# EAGLE board CT_schematic (EAGLE 7.6.0)

Size 100 x 80 mm. Coordinates in mm from the lower left corner, seen from the top.
Outline: 0,0 100,0 100,80 0,80 0,0
Copper layers (1*16): Top 0.035mm / dielectric 1.5mm / Bottom 0.035mm
Design rules "default": minimum track width 10mil, minimum drill 24mil, track to track 8mil, track to pad 8mil, pad to pad 8mil, via to via 8mil, smd to smd 8mil, copper to edge 40mil, drill to drill 8mil, minimum pad ring 10mil, minimum via ring 8mil, stop-mask expansion 4mil, vias tented up to drill 0mil, thermal gap 10mil

## Footprints (pad centres in the part's own frame; a part is rotated, then mirrored left to right if it is on the bottom)
C0603 = smd 0.8 x 0.8: 1 -0.762,0; 2 0.762,0
C0402 = smd 0.5 x 0.5: 1 -0.508,0; 2 0.508,0
C0805 = smd 1.2 x 1.3: 1 -1.016,0; 2 1.016,0
C1210 = smd 1.2 x 2.5: 1 -1.524,0; 2 1.524,0
C1206 = smd 1.3 x 1.6: 1 -1.524,0; 2 1.524,0
EXV-9H = smd 3.505 x 1.676: 1 -2.857,0; 2 2.857,0
L0603 = smd 0.8 x 0.8: 1 -0.762,0; 2 0.762,0
R0603 = smd 0.8 x 0.8: 1 -0.762,0; 2 0.762,0
DR1040 = smd 1.6 x 3.2: 1 -4.458,0; 2 4.458,0
IND_PM3316 = smd 2.921 x 2.794: 1 -5.144,0; 2 5.144,0
PJ-037B_PACKAGE = drill 3.7 square: 1 12,0 | drill 3.2 square: 2 6,0
UFBGA176_25 = smd 0.3 x 0.3: A1 -4.55,4.55; A2 -3.9,4.55; A3 -3.25,4.55; A4 -2.6,4.55; A5 -1.95,4.55; A6 -1.3,4.55; A7 -0.65,4.55; A8 0,4.55; A9 0.65,4.55; A10 1.3,4.55; A11 1.95,4.55; A12 2.6,4.55; A13 3.25,4.55; A14 3.9,4.55; A15 4.55,4.55; B1 -4.55,3.9; B2 -3.9,3.9; B3 -3.25,3.9; B4 -2.6,3.9; B5 -1.95,3.9; B6 -1.3,3.9; B7 -0.65,3.9; B8 0,3.9; B9 0.65,3.9; B10 1.3,3.9; B11 1.95,3.9; B12 2.6,3.9; B13 3.25,3.9; B14 3.9,3.9; B15 4.55,3.9; C1 -4.55,3.25; C2 -3.9,3.25; C3 -3.25,3.25; C4 -2.6,3.25; C5 -1.95,3.25; C6 -1.3,3.25; C7 -0.65,3.25; C8 0,3.25; C9 0.65,3.25; C10 1.3,3.25; C11 1.95,3.25; C12 2.6,3.25; C13 3.25,3.25; C14 3.9,3.25; C15 4.55,3.25; D1 -4.55,2.6; D2 -3.9,2.6; D3 -3.25,2.6; D4 -2.6,2.6; D5 -1.95,2.6; D6 -1.3,2.6; D7 -0.65,2.6; D8 0,2.6; D9 0.65,2.6; D10 1.3,2.6; D11 1.95,2.6; D12 2.6,2.6; D13 3.25,2.6; D14 3.9,2.6; D15 4.55,2.6; E1 -4.55,1.95; E2 -3.9,1.95; E3 -3.25,1.95; E4 -2.6,1.95; E12 2.6,1.95; E13 3.25,1.95; E14 3.9,1.95; E15 4.55,1.95; F1 -4.55,1.3; F2 -3.9,1.3; F3 -3.25,1.3; F4 -2.6,1.3; F6 -1.3,1.3; F7 -0.65,1.3; F8 0,1.3; F9 0.65,1.3; F10 1.3,1.3; F12 2.6,1.3; F13 3.25,1.3; F14 3.9,1.3; F15 4.55,1.3; G1 -4.55,0.65; G2 -3.9,0.65; G3 -3.25,0.65; G4 -2.6,0.65; G6 -1.3,0.65; G7 -0.65,0.65; G8 0,0.65; G9 0.65,0.65; G10 1.3,0.65; G12 2.6,0.65; G13 3.25,0.65; G14 3.9,0.65; G15 4.55,0.65; H1 -4.55,0; H2 -3.9,0; H3 -3.25,0; H4 -2.6,0; H6 -1.3,0; H7 -0.65,0; H8 0,0; H9 0.65,0; H10 1.3,0; H12 2.6,0; H13 3.25,0; H14 3.9,0; H15 4.55,0; J1 -4.55,-0.65; J2 -3.9,-0.65; J3 -3.25,-0.65; J4 -2.6,-0.65; J6 -1.3,-0.65; J7 -0.65,-0.65; J8 0,-0.65; J9 0.65,-0.65; J10 1.3,-0.65; J12 2.6,-0.65; J13 3.25,-0.65; J14 3.9,-0.65; J15 4.55,-0.65; K1 -4.55,-1.3; K2 -3.9,-1.3; K3 -3.25,-1.3; K4 -2.6,-1.3; K6 -1.3,-1.3; K7 -0.65,-1.3; K8 0,-1.3; K9 0.65,-1.3; K10 1.3,-1.3; K12 2.6,-1.3; K13 3.25,-1.3; K14 3.9,-1.3; K15 4.55,-1.3; L1 -4.55,-1.95; L2 -3.9,-1.95; L3 -3.25,-1.95; L4 -2.6,-1.95; L12 2.6,-1.95; L13 3.25,-1.95; L14 3.9,-1.95; L15 4.55,-1.95; M1 -4.55,-2.6; M2 -3.9,-2.6; M3 -3.25,-2.6; M4 -2.6,-2.6; M5 -1.95,-2.6; M6 -1.3,-2.6; M7 -0.65,-2.6; M8 0,-2.6; M9 0.65,-2.6; M10 1.3,-2.6; M11 1.95,-2.6; M12 2.6,-2.6; M13 3.25,-2.6; M14 3.9,-2.6; M15 4.55,-2.6; N1 -4.55,-3.25; N2 -3.9,-3.25; N3 -3.25,-3.25; N4 -2.6,-3.25; N5 -1.95,-3.25; N6 -1.3,-3.25; N7 -0.65,-3.25; N8 0,-3.25; N9 0.65,-3.25; N10 1.3,-3.25; N11 1.95,-3.25; N12 2.6,-3.25; N13 3.25,-3.25; N14 3.9,-3.25; N15 4.55,-3.25; P1 -4.55,-3.9; P2 -3.9,-3.9; P3 -3.25,-3.9; P4 -2.6,-3.9; P5 -1.95,-3.9; P6 -1.3,-3.9; P7 -0.65,-3.9; P8 0,-3.9; P9 0.65,-3.9; P10 1.3,-3.9; P11 1.95,-3.9; P12 2.6,-3.9; P13 3.25,-3.9; P14 3.9,-3.9; P15 4.55,-3.9; R1 -4.55,-4.55; R2 -3.9,-4.55; R3 -3.25,-4.55; R4 -2.6,-4.55; R5 -1.95,-4.55; R6 -1.3,-4.55; R7 -0.65,-4.55; R8 0,-4.55; R9 0.65,-4.55; R10 1.3,-4.55; R11 1.95,-4.55; R12 2.6,-4.55; R13 3.25,-4.55; R14 3.9,-4.55; R15 4.55,-4.55
10100565 = smd 0.8 x 2.35: 1 0,0; 2 1.25,0; 3 2.55,0; 4 4.25,0; 5 5.43,0; 6 6.68,0; 7 7.93,0; 8 9.18,0; 9 11.67,0; 10 14.18,0; 11 15.43,0; 12 16.68,0; 13 17.93,0; 14 19.18,0; 15 21.68,0 | smd 1.5 x 3.1: 16 23.495,-1.375; 20 25.685,-22.875 | smd 1.55 x 3.1: 17 -1.815,-1.375; 21 -1.815,-22.875 | drill 1.1 pad 1.1: 18 21.68,-2.375; 19 0.68,-2.375
QFN-32 = smd 0.6 x 0.3: 1 -2.3,1.75; 2 -2.3,1.25; 3 -2.3,0.75; 4 -2.3,0.25; 5 -2.3,-0.25; 6 -2.3,-0.75; 7 -2.3,-1.25; 8 -2.3,-1.75; 17 2.3,-1.75; 18 2.3,-1.25; 19 2.3,-0.75; 20 2.3,-0.25; 21 2.3,0.25; 22 2.3,0.75; 23 2.3,1.25; 24 2.3,1.75 | smd 0.3 x 0.6: 9 -1.75,-2.3; 10 -1.25,-2.3; 11 -0.75,-2.3; 12 -0.25,-2.3; 13 0.25,-2.3; 14 0.75,-2.3; 15 1.25,-2.3; 16 1.75,-2.3; 25 1.75,2.3; 26 1.25,2.3; 27 0.75,2.3; 28 0.25,2.3; 29 -0.25,2.3; 30 -0.75,2.3; 31 -1.25,2.3; 32 -1.75,2.3 | smd 3.2 x 3.2: EXP 0,0
7498011122R = smd 0.71 x 2.29: 1 -3.545,-3.18; 2 -2.525,-3.18; 3 -1.505,-3.18; 4 -0.485,-3.18; 5 0.535,-3.18; 6 1.555,-3.18; 8 3.595,-3.18; 9 5.635,-3.18; 10 6.655,-3.18; 11 -6.605,-3.18; 12 -5.585,-3.18 | smd 1.4 x 2.54: 13 -8.51,10.2; 14 8.51,10.2 | hole 1.4: -3.5,0; 3.5,0
TDFN-8/6MM = smd 0.3 x 0.75: 1 0,0; 2 0.5,0; 3 1,0; 4 1.5,0; 5 1.5,3; 6 1,3; 7 0.5,3; 8 0,3
VFBGA-63 = smd 0.4 x 0.4: A1 -3.6,4.4; A2 -2.8,4.4; A9 2.8,4.4; A10 3.6,4.4; B1 -3.6,3.6; B9 2.8,3.6; B10 3.6,3.6; C3 -2,2.8; C4 -1.2,2.8; C5 -0.4,2.8; C6 0.4,2.8; C7 1.2,2.8; C8 2,2.8; D3 -2,2; D4 -1.2,2; D5 -0.4,2; D6 0.4,2; D7 1.2,2; D8 2,2; E3 -2,1.2; E4 -1.2,1.2; E5 -0.4,1.2; E6 0.4,1.2; E7 1.2,1.2; E8 2,1.2; F3 -2,0.4; F4 -1.2,0.4; F5 -0.4,0.4; F6 0.4,0.4; F7 1.2,0.4; F8 2,0.4; G3 -2,-0.4; G4 -1.2,-0.4; G5 -0.4,-0.4; G6 0.4,-0.4; G7 1.2,-0.4; G8 2,-0.4; H3 -2,-1.2; H4 -1.2,-1.2; H5 -0.4,-1.2; H6 0.4,-1.2; H7 1.2,-1.2; H8 2,-1.2; J3 -2,-2; J4 -1.2,-2; J5 -0.4,-2; J6 0.4,-2; J7 1.2,-2; J8 2,-2; K3 -2,-2.8; K4 -1.2,-2.8; K5 -0.4,-2.8; K6 0.4,-2.8; K7 1.2,-2.8; K8 2,-2.8; L1 -3.6,-3.6; L2 -2.8,-3.6; L9 2.8,-3.6; L10 3.6,-3.6; M1 -3.6,-4.4; M2 -2.8,-4.4; M9 2.8,-4.4; M10 3.6,-4.4
WFDN-8 = smd 0.48 x 0.7: 1 0,0; 2 1.27,0; 3 2.54,0; 4 3.81,0; 5 3.81,4.45; 6 2.54,4.45; 7 1.27,4.45; 8 0,4.45 | smd 4 x 3: 9 1.89,2.25
RHB32_3P45X3P45 = smd 0.85 x 0.28: 1 -2.475,1.75; 2 -2.475,1.25; 3 -2.475,0.75; 4 -2.475,0.25; 5 -2.475,-0.25; 6 -2.475,-0.75; 7 -2.475,-1.25; 8 -2.475,-1.75; 17 2.475,-1.75; 18 2.475,-1.25; 19 2.475,-0.75; 20 2.475,-0.25; 21 2.475,0.25; 22 2.475,0.75; 23 2.475,1.25; 24 2.475,1.75 | smd 0.28 x 0.85: 9 -1.75,-2.475; 10 -1.25,-2.475; 11 -0.75,-2.475; 12 -0.25,-2.475; 13 0.25,-2.475; 14 0.75,-2.475; 15 1.25,-2.475; 16 1.75,-2.475; 25 1.75,2.475; 26 1.25,2.475; 27 0.75,2.475; 28 0.25,2.475; 29 -0.25,2.475; 30 -0.75,2.475; 31 -1.25,2.475; 32 -1.75,2.475 | smd 3.45 x 3.45: 33 0,0
FCI_10118193-0001LF = smd 0.4 x 1.35: 1 -1.3,2.675; 2 -0.65,2.675; 3 0,2.675; 4 0.65,2.675; 5 1.3,2.675 | smd 1.6 x 1.4: 6 -3.2,2.45; 7 3.2,2.45 | smd 1.9 x 1.9: 8 -1.2,0; 9 1.2,0 | hole 0.5: -3.3,0; 3.3,0
SOT143B = smd 1 x 0.7: 1 -0.75,-1 | smd 0.6 x 0.7: 2 0.95,-1; 3 0.95,1; 4 -0.95,1
ABS07-32.768KHZ-7-T = smd 1.1 x 2.4: 1 -2.5,0; 2 0,0
ABLS-25.000MHZ-B2F-T = smd 5.6 x 2.8: 1 -3.81,0; 2 5.69,0
ASFL1 = smd 1.7 x 1.5: 1 -1.27,-1.1; 2 1.27,-1.1; 3 1.27,1.1; 4 -1.27,1.1
HTSSOP14 = smd 1.676 x 0.356: 1 -2.8,1.95; 2 -2.8,1.3; 3 -2.8,0.65; 4 -2.8,0; 5 -2.8,-0.65; 6 -2.8,-1.3; 7 -2.8,-1.95; 8 2.8,-1.95; 9 2.8,-1.3; 10 2.8,-0.65; 11 2.8,0; 12 2.8,0.65; 13 2.8,1.3; 14 2.8,1.95 | smd 3 x 5: 15 0,0 | drill 0.4 pad 0.45: P$1 -0.75,1.5; P$2 0.75,1.5; P$3 -0.75,0; P$4 0.8,0; P$5 -0.75,-1.5; P$6 0.9,-1.5
SON-6 = smd 0.55 x 0.3: 1 -0.355,0.5 | smd 0.52 x 0.3: 2 -0.37,0; 3 -0.37,-0.5; 4 0.37,-0.5; 5 0.37,0; 6 0.37,0.5
SW_4-1437565-2 = smd 1.4 x 2.1: 1 -2.23,4.55; 2 -2.23,-4.55; 3 2.23,4.55; 4 2.23,-4.55
LGM67K-G1J2-24-Z = smd 0.8 x 1.4: A -2,0; C 0,0
NC7SZ125M5X = smd 1.3 x 0.7: 1 -1.3,0.95; 2 -1.3,0; 3 -1.3,-0.95; 4 1.3,-0.95; 5 1.3,0.95

## Placement (x,y rotation side)
C1  1e-06  [C0603]  -22.86,87.63 0 top  (outside the outline)
C2  1e-07  [C0603]  -26.67,87.63 0 top  (outside the outline)
C3  1e-07  [C0603]  -30.48,87.63 0 top  (outside the outline)
C4  1e-07  [C0603]  -34.29,87.63 0 top  (outside the outline)
C5  1e-07  [C0603]  -38.1,87.63 0 top  (outside the outline)
C6  1e-07  [C0603]  -41.91,87.63 0 top  (outside the outline)
C7  1e-07  [C0603]  -45.72,87.63 0 top  (outside the outline)
C8  1e-07  [C0603]  -49.53,87.63 0 top  (outside the outline)
C9  1e-07  [C0603]  -53.34,87.63 0 top  (outside the outline)
C10  1e-07  [C0603]  -57.15,87.63 0 top  (outside the outline)
C11  1e-07  [C0603]  -60.96,87.63 0 top  (outside the outline)
C12  1e-07  [C0603]  -64.77,87.63 0 top  (outside the outline)
C13  1e-07  [C0603]  -68.58,87.63 0 top  (outside the outline)
C14  1e-07  [C0603]  -72.39,87.63 0 top  (outside the outline)
C15  1e-07  [C0603]  -76.2,87.63 0 top  (outside the outline)
C16  1e-07  [C0603]  -80.01,87.63 0 top  (outside the outline)
C17  4.7e-06  [C0603]  -80.01,82.55 0 top  (outside the outline)
C18  1e-08  [C0603]  -83.82,87.63 0 top  (outside the outline)
C19  1e-06  [C0603]  -87.63,87.63 0 top  (outside the outline)
C20  1e-07  [C0603]  -91.44,87.63 0 top  (outside the outline)
C21  1e-07  [C0603]  -95.25,87.63 0 top  (outside the outline)
C22  2.2e-06  [C0603]  -83.82,82.55 0 top  (outside the outline)
C23  2.2e-06  [C0603]  -87.63,82.55 0 top  (outside the outline)
C24  1e-11  [C0402]  -35.56,97.79 0 top  (outside the outline)
C25  1e-11  [C0402]  -39.37,97.79 0 top  (outside the outline)
C26  1e-11  [C0402]  -43.18,97.79 0 top  (outside the outline)
C27  1e-11  [C0402]  -46.99,97.79 0 top  (outside the outline)
C28  1e-07  [C0402]  -50.8,97.79 0 top  (outside the outline)
C29  1e-05  [C0805]  -27.94,71.12 0 top  (outside the outline)
C30  2.2e-08  [C0402]  -24.13,97.79 0 top  (outside the outline)
C31  1e-06  [C0603]  -15.24,92.71 0 top  (outside the outline)
C32  1e-06  [C0603]  -19.05,92.71 0 top  (outside the outline)
C33  4.7e-10  [C0603]  -91.44,82.55 0 top  (outside the outline)
C34  1e-06  [C0603]  -22.86,92.71 0 top  (outside the outline)
C35  1e-11  [C0402]  -54.61,97.79 0 top  (outside the outline)
C36  1e-11  [C0402]  -58.42,97.79 0 top  (outside the outline)
C37  1e-08  [C0402]  -62.23,97.79 0 top  (outside the outline)
C38  1e-07  [C0402]  -66.04,97.79 0 top  (outside the outline)
C39  1e-07  [C0402]  -69.85,97.79 0 top  (outside the outline)
C40  1e-07  [C0402]  -73.66,97.79 0 top  (outside the outline)
C41  1e-07  [C0402]  -77.47,97.79 0 top  (outside the outline)
C42  2.2e-06  [C0603]  -95.25,82.55 0 top  (outside the outline)
C43  1e-07  [C0402]  -81.28,97.79 0 top  (outside the outline)
C44  1e-07  [C0402]  -85.09,97.79 0 top  (outside the outline)
C45  2.2e-06  [C0603]  -15.24,87.63 0 top  (outside the outline)
C46  1e-07  [C0402]  -88.9,97.79 0 top  (outside the outline)
C47  1e-07  [C0402]  -92.71,97.79 0 top  (outside the outline)
C48  2.2e-06  [C0603]  -19.05,87.63 0 top  (outside the outline)
C49  1e-06  [C0603]  -26.67,92.71 0 top  (outside the outline)
C50  1e-08  [C0402]  -15.24,102.87 0 top  (outside the outline)
C51  1e-06  [C0603]  -30.48,92.71 0 top  (outside the outline)
C52  3.3e-09  [C0402]  -27.94,97.79 0 top  (outside the outline)
C53  1e-07  [C0402]  -19.05,102.87 0 top  (outside the outline)
C54  2.2e-05  [C1210]  -38.1,64.77 0 top  (outside the outline)
C55  2.2e-05  [C1210]  -44.45,64.77 0 top  (outside the outline)
C56  1e-05  [C1206]  -63.5,64.77 0 top  (outside the outline)
C57  1e-05  [C1206]  -69.85,64.77 0 top  (outside the outline)
C58  1e-06  [C0603]  -34.29,92.71 0 top  (outside the outline)
C59  3.3e-09  [C0402]  -31.75,97.79 0 top  (outside the outline)
C60  1e-07  [C0402]  -22.86,102.87 0 top  (outside the outline)
C61  2.2e-05  [C1210]  -50.8,64.77 0 top  (outside the outline)
C62  2.2e-05  [C1210]  -57.15,64.77 0 top  (outside the outline)
C63  1e-05  [C1206]  -76.2,64.77 0 top  (outside the outline)
C64  1e-05  [C1206]  -82.55,64.77 0 top  (outside the outline)
C65  1e-07  [C0402]  -26.67,102.87 0 top  (outside the outline)
C66  0.0001  [EXV-9H]  -74.93,46.99 0 top  (outside the outline)
C67  0.0001  [EXV-9H]  -86.36,46.99 0 top  (outside the outline)
C68  1e-08  [C0402]  -30.48,102.87 0 top  (outside the outline)
C69  1e-08  [C0402]  -34.29,102.87 0 top  (outside the outline)
C70  1e-08  [C0402]  -38.1,102.87 0 top  (outside the outline)
F1  240.0  [L0603]  -38.1,92.71 0 top  (outside the outline)
I1  97.0  [R0603]  -41.91,92.71 0 top  (outside the outline)
I5  3.8e-06  [DR1040]  -48.26,35.56 0 top  (outside the outline)
I6  1e-05  [IND_PM3316]  -81.28,35.56 0 top  (outside the outline)
J1  PJ-037B  [PJ-037B_PACKAGE]  -91.44,7.62 0 top  (outside the outline)
R2  1000.0  [R0603]  -45.72,92.71 0 top  (outside the outline)
R7  4700.0  [R0603]  -49.53,92.71 0 top  (outside the outline)
R8  4700.0  [R0603]  -53.34,92.71 0 top  (outside the outline)
R9  4700.0  [R0603]  -57.15,92.71 0 top  (outside the outline)
R10  2200.0  [R0603]  -60.96,92.71 0 top  (outside the outline)
R12  2200.0  [R0603]  -64.77,92.71 0 top  (outside the outline)
R14  2200.0  [R0603]  -68.58,92.71 0 top  (outside the outline)
R16  2200.0  [R0603]  -72.39,92.71 0 top  (outside the outline)
R18  10000.0  [R0603]  -40.64,77.47 0 top  (outside the outline)
R19  10000.0  [R0603]  -45.72,77.47 0 top  (outside the outline)
R20  10000.0  [R0603]  -50.8,77.47 0 top  (outside the outline)
R21  100000.0  [R0603]  -41.91,71.12 0 top  (outside the outline)
R22  100000.0  [R0603]  -46.99,71.12 0 top  (outside the outline)
R23  100000.0  [R0603]  -52.07,71.12 0 top  (outside the outline)
R24  100000.0  [R0603]  -57.15,71.12 0 top  (outside the outline)
R25  100000.0  [R0603]  -62.23,71.12 0 top  (outside the outline)
R26  100000.0  [R0603]  -67.31,71.12 0 top  (outside the outline)
R27  100000.0  [R0603]  -72.39,71.12 0 top  (outside the outline)
R28  100000.0  [R0603]  -77.47,71.12 0 top  (outside the outline)
R29  100000.0  [R0603]  -82.55,71.12 0 top  (outside the outline)
R30  100000.0  [R0603]  -87.63,71.12 0 top  (outside the outline)
R31  100000.0  [R0603]  -92.71,71.12 0 top  (outside the outline)
R32  0.1  [R0603]  -76.2,92.71 0 top  (outside the outline)
R33  0.1  [R0603]  -80.01,92.71 0 top  (outside the outline)
R34  200.0  [R0603]  -83.82,92.71 0 top  (outside the outline)
R35  200.0  [R0603]  -87.63,92.71 0 top  (outside the outline)
R36  12100.0  [R0603]  -55.88,77.47 0 top  (outside the outline)
R37  49.9  [R0603]  -91.44,92.71 0 top  (outside the outline)
R38  49.9  [R0603]  -95.25,92.71 0 top  (outside the outline)
R39  49.9  [R0603]  -15.24,97.79 0 top  (outside the outline)
R40  10000.0  [R0603]  -60.96,77.47 0 top  (outside the outline)
R41  49.9  [R0603]  -19.05,97.79 0 top  (outside the outline)
R42  10000.0  [R0603]  -66.04,77.47 0 top  (outside the outline)
R43  10000.0  [R0603]  -71.12,77.47 0 top  (outside the outline)
R44  10000.0  [R0603]  -76.2,77.47 0 top  (outside the outline)
R45  10000.0  [R0603]  -81.28,77.47 0 top  (outside the outline)
R46  10000.0  [R0603]  -86.36,77.47 0 top  (outside the outline)
R47  10000.0  [R0603]  -91.44,77.47 0 top  (outside the outline)
R48  10000.0  [R0603]  -15.24,82.55 0 top  (outside the outline)
R49  10000.0  [R0603]  -20.32,82.55 0 top  (outside the outline)
R50  10000.0  [R0603]  -25.4,82.55 0 top  (outside the outline)
R51  10000.0  [R0603]  -30.48,82.55 0 top  (outside the outline)
R52  10000.0  [R0603]  -35.56,82.55 0 top  (outside the outline)
R53  100000.0  [R0603]  -15.24,77.47 0 top  (outside the outline)
R54  100000.0  [R0603]  -20.32,77.47 0 top  (outside the outline)
R55  100000.0  [R0603]  -25.4,77.47 0 top  (outside the outline)
R56  10000.0  [R0603]  -40.64,82.55 0 top  (outside the outline)
R57  10000.0  [R0603]  -45.72,82.55 0 top  (outside the outline)
R58  30000.0  [R0603]  -50.8,82.55 0 top  (outside the outline)
R59  22000.0  [R0603]  -55.88,82.55 0 top  (outside the outline)
R60  71007.101651032  [R0603]  -36.83,71.12 0 top  (outside the outline)
R61  22000.0  [R0603]  -60.96,82.55 0 top  (outside the outline)
R62  10000.0  [R0603]  -66.04,82.55 0 top  (outside the outline)
R63  10000.0  [R0603]  -71.12,82.55 0 top  (outside the outline)
R64  82000.0  [R0603]  -76.2,82.55 0 top  (outside the outline)
R65  300000.0  [R0603]  -30.48,77.47 0 top  (outside the outline)
R66  120000.0  [R0603]  -35.56,77.47 0 top  (outside the outline)
U1  STM32F765IIK6  [UFBGA176_25]  -68.58,6.35 0 top  (outside the outline)
U2  10100565  [10100565]  -40.64,25.4 0 top  (outside the outline)
U3  LAN8710AI-EZK  [QFN-32]  -22.86,48.26 0 top  (outside the outline)
U4  7498011122R  [7498011122R]  -53.34,7.62 0 top  (outside the outline)
U5  24AA00T-I/MNY  [TDFN-8/6MM]  -39.37,45.72 0 top  (outside the outline)
U6  mt29f4g08abbdah4  [VFBGA-63]  -17.78,35.56 0 top  (outside the outline)
U7  SST26WF016B-104I/MF  [WFDN-8]  -72.39,33.02 0 top  (outside the outline)
U8  TUSB1210BRHBR  [RHB32_3P45X3P45]  -58.42,57.15 0 top  (outside the outline)
U9  10118193-0001LF  [FCI_10118193-0001LF]  -64.77,45.72 0 top  (outside the outline)
U10  prtr5v0u2ax  [SOT143B]  -50.8,102.87 0 top  (outside the outline)
U11  ABS07-32.768KHZ-7-T  [ABS07-32.768KHZ-7-T]  -78.74,57.15 0 top  (outside the outline)
U12  ABLS-25.000MHZ-B2F-T  [ABLS-25.000MHZ-B2F-T]  -26.67,57.15 0 top  (outside the outline)
U13  ABLS-25.000MHZ-B2F-T  [ABLS-25.000MHZ-B2F-T]  -46.99,57.15 0 top  (outside the outline)
U14  ASFL1-26MHZ-NCS  [ASFL1]  -55.88,46.99 0 top  (outside the outline)
U15  tps54325PWP  [HTSSOP14]  -87.63,57.15 0 top  (outside the outline)
U16  tps54225PWP  [HTSSOP14]  -17.78,64.77 0 top  (outside the outline)
U17  TPS3895ADRYR  [SON-6]  -54.61,101.6 0 top  (outside the outline)
U18  4-1437565-2  [SW_4-1437565-2]  -38.1,35.56 0 top  (outside the outline)
U19  Q65110A2395  [LGM67K-G1J2-24-Z]  -26.67,64.77 0 top  (outside the outline)
U20  nc7sz125m5x  [NC7SZ125M5X]  -87.63,63.5 0 top  (outside the outline)
U21  nc7sz125m5x  [NC7SZ125M5X]  -15.24,71.12 0 top  (outside the outline)
U22  nc7sz125m5x  [NC7SZ125M5X]  -21.59,71.12 0 top  (outside the outline)

## Library data of the parts
C1-C70 F1 I1 I5 I6 J1 R2 R7-R10 R12 R14 R16 R18-R66 U1-U22 = circuit_tree

## Nets
CLK_CRYSTAL_U1_E1: C24.1 U1.E1 U11.1
CLK_CRYSTAL_U1_F1: C25.1 U1.F1 U11.2
CLK_CRYSTAL_U1_G1: C26.1 U1.G1 U12.1
CLK_CRYSTAL_U1_H1: C27.1 U1.H1 U12.2
CLK_CRYSTAL_U3_4: C36.1 U3.4 U13.2
CLK_CRYSTAL_U3_5: C35.1 U3.5 U13.1
CLK_U8_1: U8.1 U14.3
GND: C1.2 C2.2 C3.2 C4.2 C5.2 C6.2 C7.2 C8.2 C9.2 C10.2 C11.2 C12.2 C13.2 C14.2 C15.2 C16.2 C17.2 C18.2 C19.2 C20.2 C21.2 C22.2 C23.2 C24.2 C25.2 C26.2 C27.2 C28.2 C29.2 C30.2 C31.2 C32.2 C33.2 C34.2 C35.2 C36.2 C37.2 C38.2 C39.2 C40.2 C41.2 C42.2 C43.2 C44.2 C45.2 C46.2 C47.2 C48.2 C49.2 C50.2 C51.2 C52.2 C54.2 C55.2 C56.2 C57.2 C58.2 C59.2 C61.2 C62.2 C63.2 C64.2 C65.2 C66.2 C67.2 C68.2 C69.2 C70.2 J1.2 R2.2 R18.2 R20.2 R32.2 R33.2 R34.2 R36.2 R47.2 R59.2 R61.2 R64.2 R66.2 U1.D5 U1.D7 U1.D8 U1.D9 U1.F2 U1.F6 U1.F7 U1.F8 U1.F9 U1.F10 U1.F12 U1.G2 U1.G6 U1.G7 U1.G8 U1.G9 U1.G10 U1.G12 U1.H6 U1.H7 U1.H8 U1.H9 U1.H10 U1.H12 U1.J6 U1.J7 U1.J8 U1.J9 U1.J10 U1.K6 U1.K7 U1.K8 U1.K9 U1.K10 U1.M1 U1.M8 U1.M9 U1.N1 U2.6 U2.10 U2.12 U2.16 U2.17 U2.20 U2.21 U3.EXP U4.10 U5.4 U6.C5 U6.F7 U6.K3 U6.K8 U7.4 U7.9 U8.33 U9.5 U9.6 U9.7 U9.8 U9.9 U10.1 U14.2 U15.5 U15.8 U15.9 U15.15 U16.5 U16.8 U16.9 U16.15 U17.2 U19.C U20.1 U20.3 U21.1 U21.3 U22.1 U22.3
NET_U1_C6: R19.1 U1.C6
NET_U1_D6: R18.1 U1.D6
NET_U1_E2: R12.1 U1.E2 U5.5
NET_U1_F13: C23.1 U1.F13
NET_U1_H3: R10.1 U1.H3 U5.6
NET_U1_J1: R8.1 U1.J1 U21.4
NET_U1_L4: R20.1 U1.L4
NET_U1_M3: R14.1 U1.M3 U3.17
NET_U1_M10: C22.1 U1.M10
NET_U1_P2: R16.1 U1.P2 U3.16
NET_U1_R1: C18.1 C19.1 F1.1 U1.P1 U1.R1
NET_U1_R14: U19.A
NET_U1_R15: U18.3 U18.4
NET_U2_1: R23.1 U2.1
NET_U2_2: R22.1 U2.2
NET_U2_18: U2.18 U2.19
NET_U3_1: C31.1 I1.1 R37.2 R38.2 R39.2 R41.2 U3.1 U3.27
NET_U3_6: C32.1 C33.1 U3.6
NET_U3_18: R40.1 U3.18
NET_U3_19: R7.1 U3.19 U20.4
NET_U3_32: R36.1 U3.32
NET_U4_1: R37.1 U3.29 U4.1
NET_U4_3: R35.2 R38.1 U3.28 U4.3
NET_U4_4: R39.1 U3.31 U4.4
NET_U4_5: C30.1 U4.2 U4.5
NET_U4_6: R41.1 U3.30 U4.6
NET_U4_8: R33.1 U4.8
NET_U4_9: R35.1 U4.9
NET_U4_11: U3.2 U4.11
NET_U4_12: R34.1 U4.12
NET_U4_13: R32.1 U4.13 U4.14
NET_U6_C3: R52.1 U6.C3
NET_U8_11: R56.1 U8.11
NET_U8_12: C48.1 U8.12
NET_U8_14: R57.1 U8.14
NET_U8_20: C45.1 U8.20
NET_U8_27: R9.1 U8.27 U22.4
NET_U9_1: C49.1 U8.22 U9.1 U10.4
NET_U9_2: U8.19 U9.2 U10.3
NET_U9_3: U8.18 U9.3 U10.2
NET_U15_2: R58.2 R59.1 U15.2
NET_U15_3: C51.1 U15.3
NET_U15_4: C52.1 U15.4
NET_U15_10: C53.1 I5.1 U15.10 U15.11
NET_U15_12: C53.2 U15.12
NET_U16_2: R60.2 R61.1 U16.2
NET_U16_3: C58.1 U16.3
NET_U16_4: C59.1 U16.4
NET_U16_10: C60.1 I6.1 U16.10 U16.11
NET_U16_12: C60.2 U16.12
NET_U17_1: R63.1 R64.1 U17.1
NET_U17_3: R65.2 R66.1 U17.3
NET_U17_4: R62.1 U17.4 U20.2 U21.2 U22.2
NET_U18_1: R2.1 U18.1 U18.2
PROC_ETH_COL: R44.1 U1.G4 U3.15
PROC_ETH_CRS: U1.F4 U3.14
PROC_ETH_RX_CLK: R46.1 U1.N2 U3.7
PROC_ETH_RX_DV: U1.R3 U3.26
PROC_ETH_RX_ER: R45.1 U1.E3 U3.13
PROC_ETH_RXD0: R42.1 U1.N5 U3.11
PROC_ETH_RXD1: R43.1 U1.P5 U3.10
PROC_ETH_RXD2: U1.M11 U3.9
PROC_ETH_RXD3: R47.1 U1.N12 U3.8
PROC_ETH_TX_CLK: U1.M5 U3.20
PROC_ETH_TX_EN: U1.B9 U3.21
PROC_ETH_TXD0: U1.A8 U3.22
PROC_ETH_TXD1: U1.A7 U3.23
PROC_ETH_TXD2: U1.M4 U3.24
PROC_ETH_TXD3: U1.A2 U3.25
PROC_FMC_A16: U1.N14 U6.D5
PROC_FMC_A17: U1.N13 U6.C4
PROC_FMC_D0: U1.M14 U6.H4
PROC_FMC_D1: U1.L14 U6.J4
PROC_FMC_D2: U1.B12 U6.K4
PROC_FMC_D3: U1.C12 U6.K5
PROC_FMC_D4: U1.R8 U6.K6
PROC_FMC_D5: U1.P8 U6.J7
PROC_FMC_D6: U1.P9 U6.K7
PROC_FMC_D7: U1.R9 U6.J8
PROC_FMC_INT: R48.1 U1.J14 U6.C8
PROC_FMC_NCE: R49.1 U1.C10 U6.C6
PROC_FMC_NOE: R51.1 U1.D10 U6.D4
PROC_FMC_NWE: R50.1 U1.C11 U6.C7
PROC_QUADSPI_BK1_IO0: U1.L3 U7.5
PROC_QUADSPI_BK1_IO1: U1.L2 U7.2
PROC_QUADSPI_BK1_IO2: R54.1 U1.K1 U7.3
PROC_QUADSPI_BK1_IO3: R55.1 U1.K2 U7.7
PROC_QUADSPI_BK1_NCS: R53.1 U1.B6 U7.1
PROC_QUADSPI_CLK: U1.L1 U7.6
PROC_SDMMC1_CK: R21.1 U1.A12 U2.8
PROC_SDMMC1_D0: R24.1 U1.G14 U2.4
PROC_SDMMC1_D1: R25.1 U1.F14 U2.3
PROC_SDMMC1_D2: R26.1 U1.B14 U2.15
PROC_SDMMC1_D3: R27.1 U1.B13 U2.14
PROC_SDMMC1_D4: R28.1 U1.A5 U2.13
PROC_SDMMC1_D5: R29.1 U1.B4 U2.11
PROC_SDMMC1_D6: R30.1 U1.H15 U2.7
PROC_SDMMC1_D7: R31.1 U1.G15 U2.5
PROC_USB_OTG_HS_ULPI_CK: U1.P4 U8.26
PROC_USB_OTG_HS_ULPI_D0: U1.R2 U8.3
PROC_USB_OTG_HS_ULPI_D1: U1.R5 U8.4
PROC_USB_OTG_HS_ULPI_D2: U1.R4 U8.5
PROC_USB_OTG_HS_ULPI_D3: U1.R12 U8.6
PROC_USB_OTG_HS_ULPI_D4: U1.R13 U8.7
PROC_USB_OTG_HS_ULPI_D5: U1.P12 U8.9
PROC_USB_OTG_HS_ULPI_D6: U1.P13 U8.10
PROC_USB_OTG_HS_ULPI_D7: U1.A6 U8.13
PROC_USB_OTG_HS_ULPI_DIR: U1.E4 U8.31
PROC_USB_OTG_HS_ULPI_NXT: U1.H4 U8.2
PROC_USB_OTG_HS_ULPI_STP: U1.M2 U8.29
VCC_S1_15V2: C56.1 C57.1 C63.1 C64.1 C66.1 C67.1 J1.1 U15.7 U15.13 U15.14 U16.7 U16.13 U16.14
VCC_TIER1_1V8: C1.1 C2.1 C3.1 C4.1 C5.1 C6.1 C7.1 C8.1 C9.1 C10.1 C11.1 C12.1 C13.1 C14.1 C15.1 C16.1 C17.1 C21.1 C28.1 C29.1 C34.1 C37.1 C38.1 C39.1 C40.1 C41.1 C42.1 C43.1 C46.1 C47.1 C54.1 C55.1 C65.1 C68.1 C69.1 C70.1 F1.2 I5.2 R7.2 R8.2 R9.2 R10.2 R12.2 R14.2 R16.2 R19.2 R21.2 R22.2 R23.2 R24.2 R25.2 R26.2 R27.2 R28.2 R29.2 R30.2 R31.2 R40.2 R42.2 R43.2 R44.2 R45.2 R46.2 R48.2 R49.2 R50.2 R51.2 R52.2 R53.2 R54.2 R55.2 R56.2 R57.2 R58.1 R62.2 R63.2 R65.1 U1.C1 U1.C5 U1.C7 U1.C8 U1.C9 U1.F3 U1.G3 U1.G13 U1.J12 U1.J13 U1.K4 U1.N8 U1.N9 U1.N10 U2.9 U3.12 U5.8 U6.D3 U6.G4 U6.H8 U6.J6 U7.8 U8.28 U8.30 U8.32 U15.1 U17.6 U20.5 U21.5 U22.5
VCC_TIER1_3V3: C20.1 C44.1 C50.1 C61.1 C62.1 I1.2 I6.2 R60.1 U1.H13 U8.21 U14.4 U16.1

## Tracks (layer width: path | path; a pad name or v marks a point on that pad's centre or on a via)
CLK_CRYSTAL_U1_E1  (2 unrouted)
CLK_CRYSTAL_U1_F1  (2 unrouted)
CLK_CRYSTAL_U1_G1  (2 unrouted)
CLK_CRYSTAL_U1_H1  (2 unrouted)
CLK_CRYSTAL_U3_4  (2 unrouted)
CLK_CRYSTAL_U3_5  (2 unrouted)
CLK_U8_1  (1 unrouted)
GND  (158 unrouted)
NET_U1_C6  (1 unrouted)
NET_U1_D6  (1 unrouted)
NET_U1_E2  (2 unrouted)
NET_U1_F13  (1 unrouted)
NET_U1_H3  (2 unrouted)
NET_U1_J1  (2 unrouted)
NET_U1_L4  (1 unrouted)
NET_U1_M3  (2 unrouted)
NET_U1_M10  (1 unrouted)
NET_U1_P2  (2 unrouted)
NET_U1_R1  (4 unrouted)
NET_U1_R15  (1 unrouted)
NET_U2_1  (1 unrouted)
NET_U2_2  (1 unrouted)
NET_U2_18  (1 unrouted)
NET_U3_1  (7 unrouted)
NET_U3_6  (2 unrouted)
NET_U3_18  (1 unrouted)
NET_U3_19  (2 unrouted)
NET_U3_32  (1 unrouted)
NET_U4_1  (2 unrouted)
NET_U4_3  (3 unrouted)
NET_U4_4  (2 unrouted)
NET_U4_5  (2 unrouted)
NET_U4_6  (2 unrouted)
NET_U4_8  (1 unrouted)
NET_U4_9  (1 unrouted)
NET_U4_11  (1 unrouted)
NET_U4_12  (1 unrouted)
NET_U4_13  (2 unrouted)
NET_U6_C3  (1 unrouted)
NET_U8_11  (1 unrouted)
NET_U8_12  (1 unrouted)
NET_U8_14  (1 unrouted)
NET_U8_20  (1 unrouted)
NET_U8_27  (2 unrouted)
NET_U9_1  (3 unrouted)
NET_U9_2  (2 unrouted)
NET_U9_3  (2 unrouted)
NET_U15_2  (2 unrouted)
NET_U15_3  (1 unrouted)
NET_U15_4  (1 unrouted)
NET_U15_10  (3 unrouted)
NET_U15_12  (1 unrouted)
NET_U16_2  (2 unrouted)
NET_U16_3  (1 unrouted)
NET_U16_4  (1 unrouted)
NET_U16_10  (3 unrouted)
NET_U16_12  (1 unrouted)
NET_U17_1  (2 unrouted)
NET_U17_3  (2 unrouted)
NET_U17_4  (4 unrouted)
NET_U18_1  (2 unrouted)
PROC_ETH_COL  (2 unrouted)
PROC_ETH_CRS  (1 unrouted)
PROC_ETH_RX_CLK  (2 unrouted)
PROC_ETH_RX_DV  (1 unrouted)
PROC_ETH_RX_ER  (2 unrouted)
PROC_ETH_RXD0  (2 unrouted)
PROC_ETH_RXD1  (2 unrouted)
PROC_ETH_RXD2  (1 unrouted)
PROC_ETH_RXD3  (2 unrouted)
PROC_ETH_TX_CLK  (1 unrouted)
PROC_ETH_TX_EN  (1 unrouted)
PROC_ETH_TXD0  (1 unrouted)
PROC_ETH_TXD1  (1 unrouted)
PROC_ETH_TXD2  (1 unrouted)
PROC_ETH_TXD3  (1 unrouted)
PROC_FMC_A16  (1 unrouted)
PROC_FMC_A17  (1 unrouted)
PROC_FMC_D0  (1 unrouted)
PROC_FMC_D1  (1 unrouted)
PROC_FMC_D2  (1 unrouted)
PROC_FMC_D3  (1 unrouted)
PROC_FMC_D4  (1 unrouted)
PROC_FMC_D5  (1 unrouted)
PROC_FMC_D6  (1 unrouted)
PROC_FMC_D7  (1 unrouted)
PROC_FMC_INT  (2 unrouted)
PROC_FMC_NCE  (2 unrouted)
PROC_FMC_NOE  (2 unrouted)
PROC_FMC_NWE  (2 unrouted)
PROC_QUADSPI_BK1_IO0  (1 unrouted)
PROC_QUADSPI_BK1_IO1  (1 unrouted)
PROC_QUADSPI_BK1_IO2  (2 unrouted)
PROC_QUADSPI_BK1_IO3  (2 unrouted)
PROC_QUADSPI_BK1_NCS  (2 unrouted)
PROC_QUADSPI_CLK  (1 unrouted)
PROC_SDMMC1_CK  (2 unrouted)
PROC_SDMMC1_D0  (2 unrouted)
PROC_SDMMC1_D1  (2 unrouted)
PROC_SDMMC1_D2  (2 unrouted)
PROC_SDMMC1_D3  (2 unrouted)
PROC_SDMMC1_D4  (2 unrouted)
PROC_SDMMC1_D5  (2 unrouted)
PROC_SDMMC1_D6  (2 unrouted)
PROC_SDMMC1_D7  (2 unrouted)
PROC_USB_OTG_HS_ULPI_CK  (1 unrouted)
PROC_USB_OTG_HS_ULPI_D0  (1 unrouted)
PROC_USB_OTG_HS_ULPI_D1  (1 unrouted)
PROC_USB_OTG_HS_ULPI_D2  (1 unrouted)
PROC_USB_OTG_HS_ULPI_D3  (1 unrouted)
PROC_USB_OTG_HS_ULPI_D4  (1 unrouted)
PROC_USB_OTG_HS_ULPI_D5  (1 unrouted)
PROC_USB_OTG_HS_ULPI_D6  (1 unrouted)
PROC_USB_OTG_HS_ULPI_D7  (1 unrouted)
PROC_USB_OTG_HS_ULPI_DIR  (1 unrouted)
PROC_USB_OTG_HS_ULPI_NXT  (1 unrouted)
PROC_USB_OTG_HS_ULPI_STP  (1 unrouted)
VCC_S1_15V2  (12 unrouted)
VCC_TIER1_1V8  (106 unrouted)
VCC_TIER1_3V3  (11 unrouted)